# Altium PCB AT606IO_VB1.PcbDoc (part 1 of 2)
Units mm, origin at the board's own origin, x right, y up, seen from the top; angles counter-clockwise.
Board outline 66.03 x 73.03 mm, 2 copper layers (TOP, BOTTOM), stack 0.264 mm thick; 2 components, 10 nets, 12 pads, 245 vias.
Unrouted connection lines stored in the file: 2.
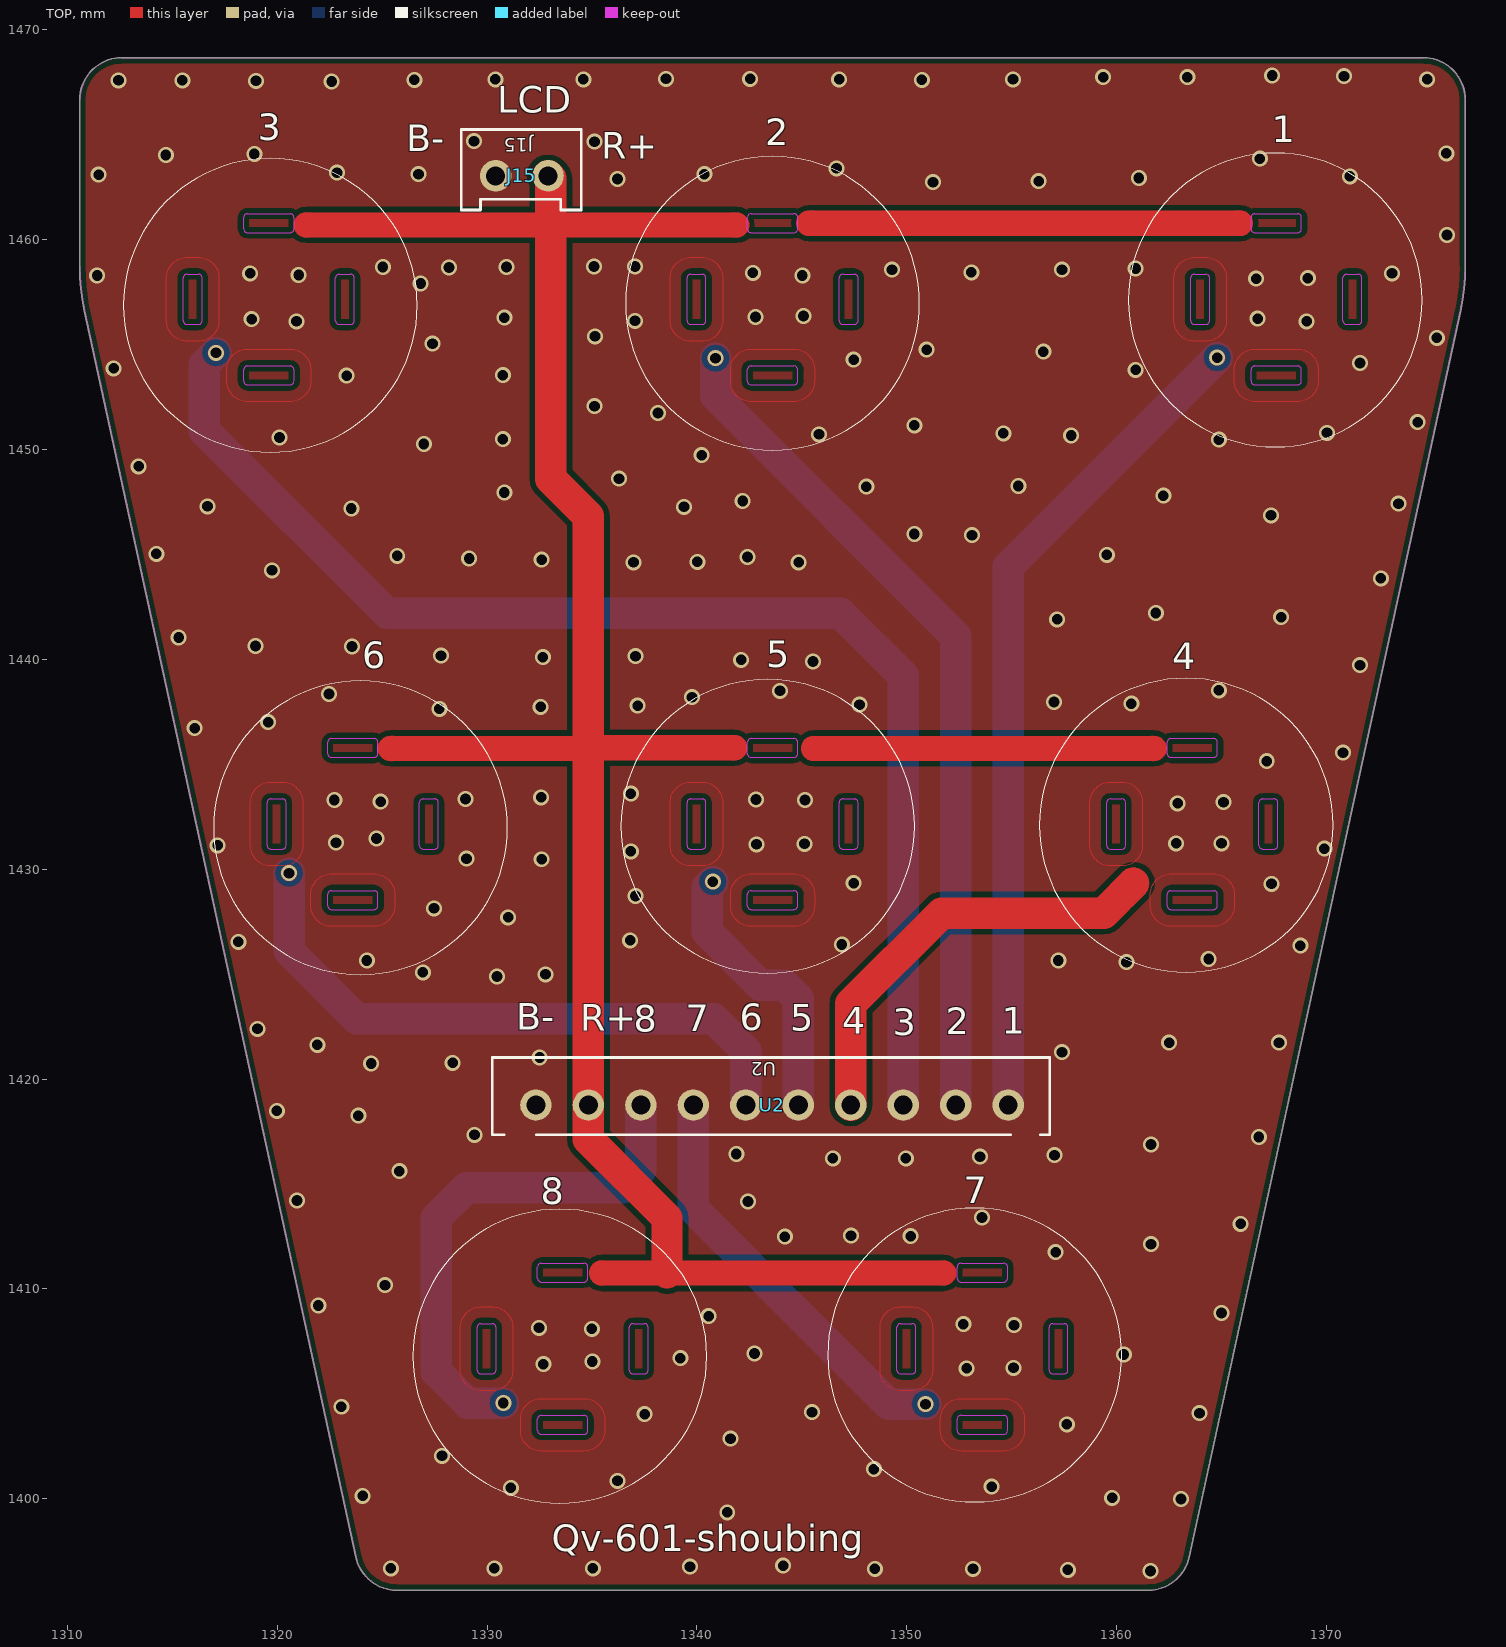
[diagram p0: TOP view]
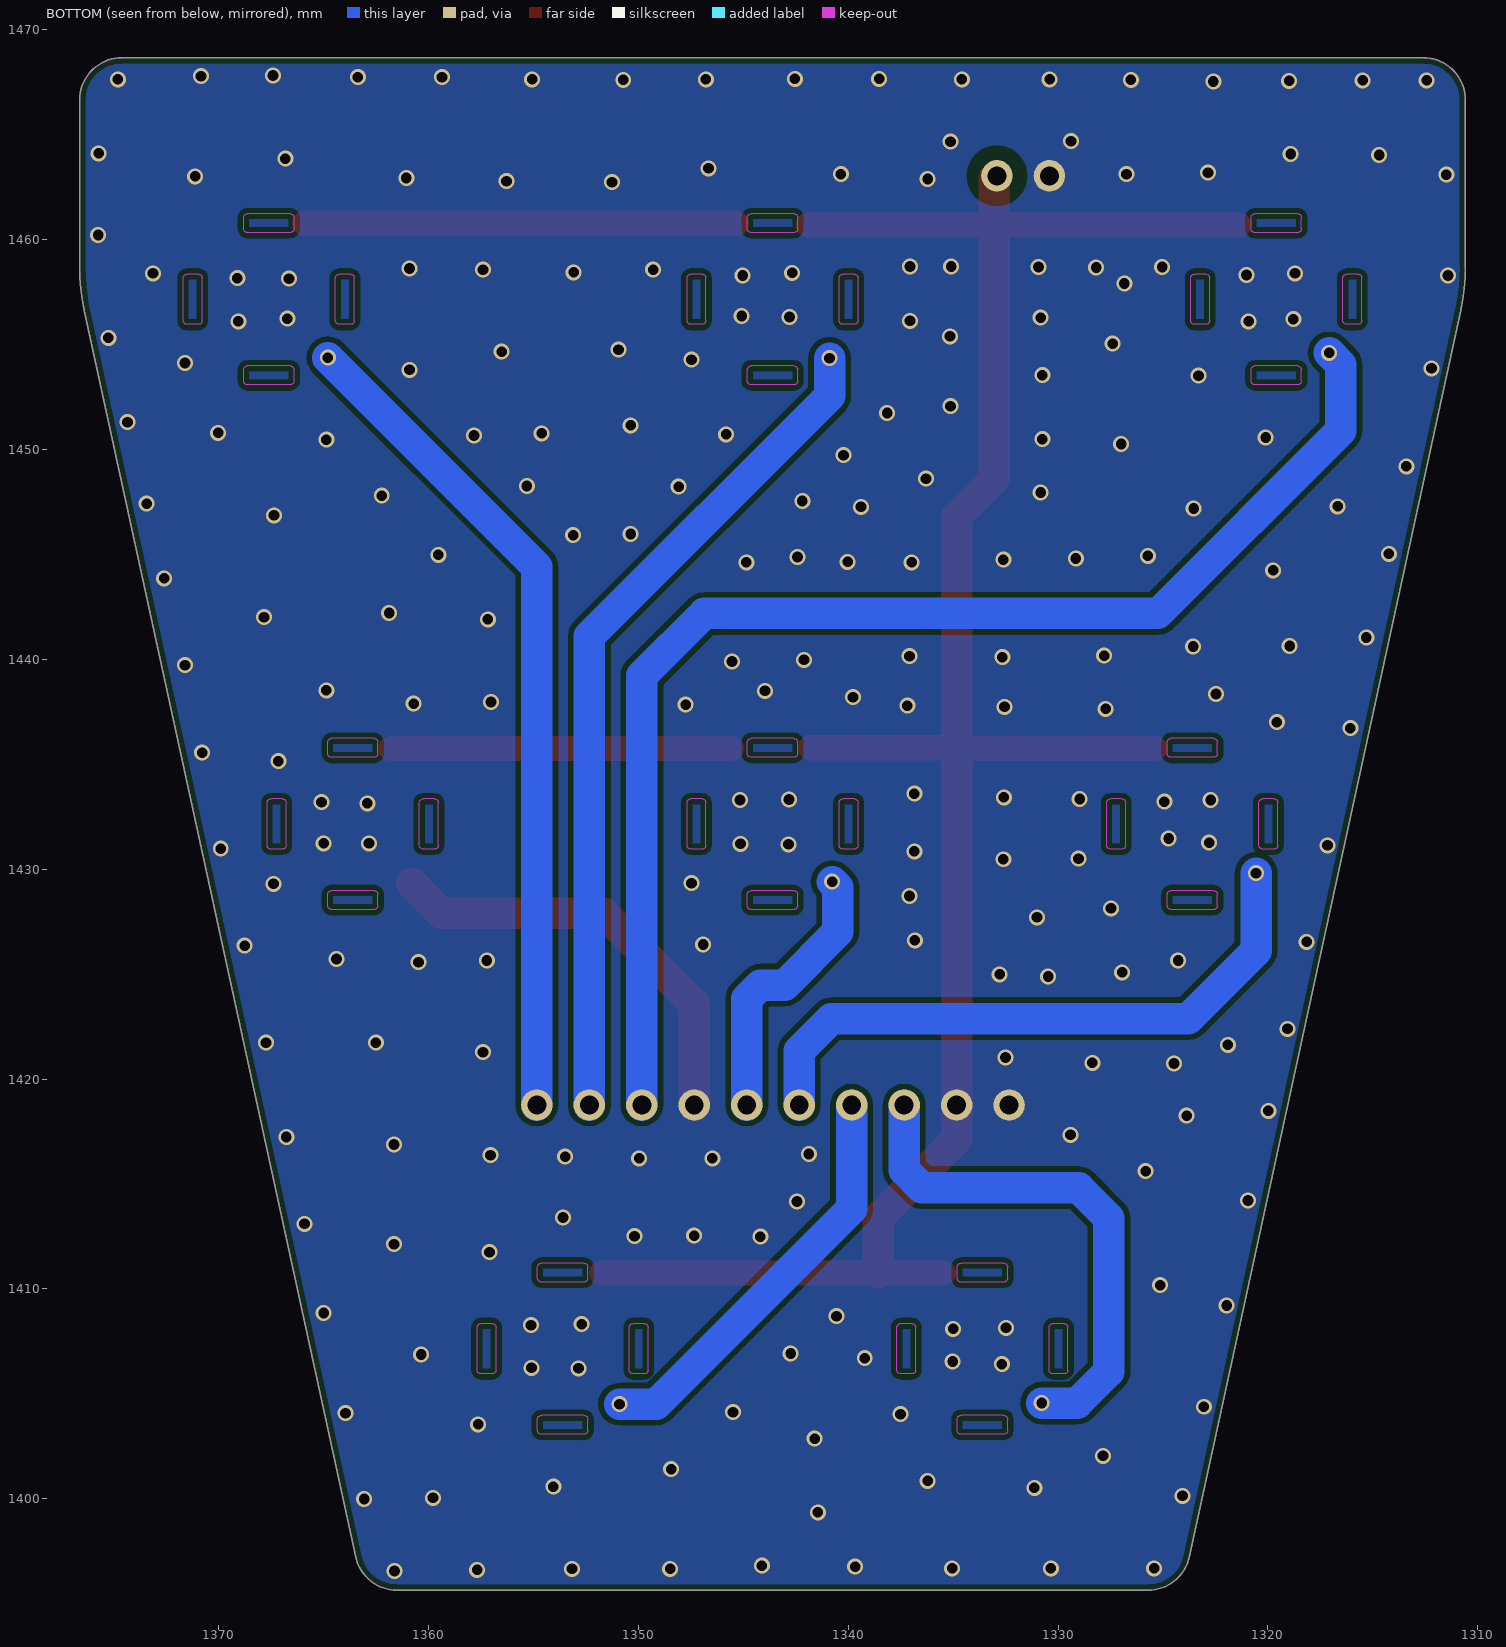
[diagram p1: BOTTOM view, seen from below]

## Layer stack, top to bottom
Top Solder: solder mask 0.0102, Solder Resist, Dk 3.5
TOP: signal copper 0.0305
Dielectric 1: core 0.2032, FR-4, Dk 4.5
BOTTOM: signal copper 0.0305
Bottom Solder: solder mask 0.0102, Solder Resist, Dk 3.5

## Board outline
1310.59,1458.731 ccw(c1320.603,1458.731) 1310.819,1456.6 1323.747,1397.227 1323.747,1397.226 ccw(c1325.714,1397.654) 1325.714,1395.642 1361.491,1395.642 ccw(c1361.491,1397.654) 1363.458,1397.226 1363.458,1397.227 1376.386,1456.6 ccw(c1366.603,1458.73) 1376.615,1458.73 1376.615,1466.655 ccw(c1374.603,1466.655) 1374.603,1468.667 1312.603,1468.667 ccw(c1312.603,1466.655) 1310.59,1466.655

## Design rules (kind name [scope] priority, off if disabled: settings)
Clearance [All] p1: gap=0.254 ignorepadtopadclearanceinfootprint=FALSE except(0: Arc-Hole Track-Hole SMDPad-Hole THPad-Hole Via-Hole Fill-Hole Poly-Hole Region-Hole Text-Hole)
PlaneConnect [All] p1: planeconnectstyle=Direct reliefexpansion=0.508 reliefentries=4 reliefconductorwidth=0.254 reliefairgap=0.254
PolygonConnect [All] p1: connectstyle=Direct reliefconductorwidth=0.254 reliefentries=4 polygonreliefangle="90 Angle" airgapwidth=0.254
RoutingVias [All] p1: holewidth=0.711 width=1.27 viastyle="Through Hole" minholewidth=0.711 minwidth=1.27 maxholewidth=0.711 maxwidth=1.27
SolderMaskExpansion [All] p1: expansion=0.102
Width [All] p1: maxlimit=0.254 minlimit=0.254 preferedwidth=0.254 impedancedriven=TRUE minimp=40.960000 maximp=62.730000 favimp=16.190000
29 further rules are at their usual default settings.

## Components (designator, comment, footprint, x,y, rotation, side; value= is the part's Value field where it differs from the comment)
J15 "CON2_XH2R54-21_ZX-XH2.54-2PZZ" XH2R54-21 1332.91,1463.038 r180 top
U2 "CON10_XH2R54-10P1_ZX-XH2.54-10P" XH2R54-10P1 1354.83,1418.766 r180 top

## Footprints (in the part's own frame and the unit in brackets; to place one, negate y for a bottom-side part, rotate by r counter-clockwise, add the part's x,y. Pads: shape width x height; smd on the part's side, far side on the other; paste and mask are expansions set on the pad)
XH2R54-10P1 [mm] "XH2R54-10P1"
  round 1.5 / inner round 1.524 / far side round 1.5 hole 0.9: 1(0,0) 2(2.5,0) 3(5,0) 4(7.5,0) 5(10,0) 6(12.5,0) 7(15,0) 8(17.5,0) 9(20,0) 10(22.5,0)
  silkscreen extent -1.98,-2.26 24.59,1.42, body extent -2.04,-2.32 24.65,1.49, height 3.81
XH2R54-21 [mm] "XH2R54-21"
  round 1.5 / inner round 1.524 / far side round 1.5 hole 0.9: 1(0,0) 2(2.5,0)
  silkscreen extent -1.57,-2.21 4.14,1.63, body extent -1.64,-2.27 4.2,1.69, height 3.81

## Via types
v1: diameter 0.762, hole 0.508, TOP to BOTTOM, 245 vias

## Nets (pads, with @x,y where several pads share a name; then routed paths per layer and width w, separated by ;. In a path a pad name is that pad's centre, name@x,y a point inside that pad or via, vN(x,y) a via of type N, cw(c..) or ccw(c..) an arc to the next point about the centre after c; other vN are vias at no path point)
1: U2.1 | length 39.7
  BOTTOM w1.5: U2.1@1354.83,1418.766 1354.83,1444.42 v1(1364.787,1454.376)
2: U2.2 | length 40.3
  BOTTOM w1.5: v1(1340.886,1454.351) 1340.886,1452.548 1352.33,1441.103 U2.2@1352.33,1418.766
3: U2.3 | length 62.5
  BOTTOM w1.5: v1(1317.086,1454.605) 1316.527,1454.046 1316.527,1450.897 1325.239,1442.184 1346.855,1442.184 1349.83,1439.209 U2.3@1349.83,1418.766
4: U2.4 | length 20.7
  TOP w1.5: U2.4@1347.33,1418.766 1347.33,1423.585 1351.655,1427.91 1359.377,1427.91 1360.799,1429.332
5: U2.5 | length 13.2
  BOTTOM w1.5: v1(1340.759,1429.408) 1340.486,1429.135 1340.486,1427.014 1343.019,1424.481 1344.188,1424.481 1344.83,1423.838 U2.5@1344.83,1418.766
6: U2.6 | length 30
  BOTTOM w1.5: v1(1320.566,1429.815) 1320.566,1426.106 1323.792,1422.88 1340.81,1422.88 1342.33,1421.36 U2.6@1342.33,1418.766
7: U2.7 | length 19.9
  BOTTOM w1.5: U2.7@1339.83,1418.766 1339.83,1413.827 1349.141,1404.516 v1(1350.893,1404.516)
8: U2.8 | length 24.9
  BOTTOM w1.5: v1(1330.777,1404.567) 1329.076,1404.567 1327.576,1406.067 1327.576,1413.381 1329.024,1414.829 1336.492,1414.829 1337.33,1415.667 U2.8@1337.33,1418.766
GND: J15.2 U2.10
  other v1: 1361.612,1396.566 1357.675,1396.617 1348.48,1396.668 1353.154,1396.668 1325.417,1396.693 1330.345,1396.693 1335.044,1396.693 1339.667,1396.769 1344.112,1396.82 1341.445,1399.36 1363.06,1399.995 1359.783,1400.046 1324.071,1400.147 1331.132,1400.528 1354.043,1400.579 1336.212,1400.859 1348.43,1401.417 1327.856,1402.052 1341.597,1402.865 1357.624,1403.551 1337.508,1404.034 1363.949,1404.084 1345.483,1404.135 1323.055,1404.389 1352.849,1406.218 1355.084,1406.243 1332.682,1406.421 1335.018,1406.548 1339.209,1406.701 1360.342,1406.878 1342.74,1406.929 1334.993,1408.098 1332.478,1408.148 1355.11,1408.275 1352.697,1408.326 1340.556,1408.707 1364.99,1408.86 1321.963,1409.215 1325.138,1410.18 1357.091,1411.755 1361.638,1412.136 1344.188,1412.492 1350.182,1412.517 1347.337,1412.543 1365.905,1413.101 1353.586,1413.406 1342.435,1414.168 1320.947,1414.219 1325.824,1415.616 1346.474,1416.226 1349.954,1416.226 1353.484,1416.302 1357.04,1416.378 1341.876,1416.429 1361.638,1416.886 1366.768,1417.242 1329.405,1417.343 1323.868,1418.258 1319.982,1418.486 1324.477,1420.747 1328.364,1420.772 1332.504,1421.026 1357.396,1421.28 1321.912,1421.636 1362.501,1421.737 1367.734,1421.737 1319.067,1422.398 1330.472,1424.887 1332.783,1424.989 1326.941,1425.09 1360.469,1425.573 1324.274,1425.649 1357.218,1425.649 1364.381,1425.725 1368.75,1426.36 1346.906,1426.411 1318.153,1426.538 1336.822,1426.614 1331.005,1427.706 1327.475,1428.138 1337.076,1428.722 1367.378,1429.307 1347.464,1429.332 1332.605,1430.475 1329.024,1430.5 1336.847,1430.856 1369.893,1430.983 1317.162,1431.135 1342.842,1431.186 1345.128,1431.212 1362.831,1431.237 1364.99,1431.237 1322.801,1431.262 1324.731,1431.466 1362.908,1433.142 1365.092,1433.193 1324.935,1433.218 1322.725,1433.294 1345.153,1433.294 1342.816,1433.32 1328.973,1433.345 1332.58,1433.421 1336.847,1433.599 1367.149,1435.149 1370.782,1435.555 1316.07,1436.723 1319.575,1437.003 1327.729,1437.638 1332.555,1437.739 1337.177,1437.79 1347.744,1437.841 1360.698,1437.892 1357.015,1437.968 1339.768,1438.197 1322.471,1438.349 1343.959,1438.501 1364.863,1438.527 1371.594,1439.721 1345.534,1439.898 1342.105,1439.975 1332.656,1440.102 1337.076,1440.152 1327.805,1440.178 1323.563,1440.61 1318.966,1440.635 1315.308,1441.041 1357.167,1441.905 1367.835,1442.007 1361.866,1442.21 1372.585,1443.861 1319.753,1444.242 1336.974,1444.623 1344.848,1444.623 1340.022,1444.648 1332.605,1444.75 1329.151,1444.801 1342.41,1444.877 1325.722,1444.928 1359.529,1444.978 1314.241,1445.029 1353.103,1445.918 1350.36,1445.969 1367.353,1446.858 1323.538,1447.188 1339.387,1447.264 1316.68,1447.29 1373.423,1447.417 1342.181,1447.544 1362.222,1447.798 1330.827,1447.95 1348.074,1448.23 1355.313,1448.255 1336.288,1448.611 1313.403,1449.195 1340.225,1449.728 1326.992,1450.262 1364.863,1450.465 1330.751,1450.49 1320.109,1450.566 1357.828,1450.668 1345.813,1450.719 1354.602,1450.77 1370.02,1450.795 1350.36,1451.151 1374.338,1451.303 1338.143,1451.735 1335.12,1452.065 1323.309,1453.513 1330.751,1453.538 1360.901,1453.792 1312.209,1453.868 1371.594,1454.122 1347.464,1454.275 1356.507,1454.656 1350.944,1454.757 1327.398,1455.037 1375.252,1455.316 1335.145,1455.392 1320.921,1456.104 1369.054,1456.104 1337.05,1456.129 1318.788,1456.205 1366.718,1456.231 1330.827,1456.281 1342.791,1456.307 1345.077,1456.358 1326.84,1457.907 1366.641,1458.136 1369.105,1458.161 1311.422,1458.288 1345.026,1458.288 1321.023,1458.313 1318.712,1458.39 1373.118,1458.39 1342.664,1458.415 1353.078,1458.44 1349.293,1458.567 1357.396,1458.567 1360.901,1458.618 1328.186,1458.669 1325.036,1458.694 1330.929,1458.694 1335.095,1458.72 1337.05,1458.72 1375.735,1460.218 1351.249,1462.733 1356.278,1462.784 1336.212,1462.885 1361.053,1462.936 1371.112,1463.012 1311.498,1463.089 1326.738,1463.114 1340.352,1463.114 1322.852,1463.19 1346.652,1463.393 1366.819,1463.851 1314.698,1464.028 1318.915,1464.079 1375.709,1464.105 1335.12,1464.663 1329.38,1464.689 1322.598,1467.534 1318.991,1467.559 1312.438,1467.584 1315.486,1467.584 1326.535,1467.61 1350.716,1467.61 1330.396,1467.635 1334.587,1467.635 1346.779,1467.635 1355.059,1467.635 1374.795,1467.635 1338.524,1467.661 1342.537,1467.661 1359.352,1467.737 1363.365,1467.737 1370.832,1467.788 1367.403,1467.813
V+: J15.1 U2.9 | length 144.7
  TOP w1.2: 1321.379,1460.701 1333.012,1460.701 1333.037,1460.726 1333.063,1460.701 1341.902,1460.701 ; 1325.392,1435.758 1334.805,1435.758 1334.83,1435.733 1334.881,1435.784 1341.8,1435.784 ; 1335.45,1410.765 1338.574,1410.765 1351.757,1410.765 ; 1345.331,1460.777 1365.905,1460.777 ; 1345.559,1435.758 1361.79,1435.758
  TOP w1.5: J15.1@1332.91,1463.038 1333.037,1462.911 1333.037,1460.726 1333.037,1448.611 1334.83,1446.817 1334.83,1435.733 U2.9@1334.83,1418.766 1334.83,1417.125 1338.574,1413.381 1338.574,1410.765

## Polygon pours and split planes (outlines as drawn)
no net on Top Solder (solid): 82 vertices, not listed, extent 1314.728,1455.155 1317.228,1459.155
no net on Top Solder (solid): 82 vertices, not listed, extent 1317.603,1452.28 1321.603,1454.78
no net on Top Solder (solid): 82 vertices, not listed, extent 1317.603,1459.53 1321.603,1462.029
no net on Top Solder (solid): 82 vertices, not listed, extent 1321.978,1455.155 1324.478,1459.155
no net on Top Solder (solid): 82 vertices, not listed, extent 1338.728,1455.155 1341.228,1459.155
no net on Top Solder (solid): 82 vertices, not listed, extent 1341.603,1452.28 1345.603,1454.78
no net on Top Solder (solid): 82 vertices, not listed, extent 1341.603,1459.53 1345.603,1462.029
no net on Top Solder (solid): 82 vertices, not listed, extent 1345.978,1455.155 1348.478,1459.155
no net on Top Solder (solid): 82 vertices, not listed, extent 1365.603,1452.28 1369.603,1454.78
no net on Top Solder (solid): 82 vertices, not listed, extent 1365.603,1459.53 1369.603,1462.029
no net on Top Solder (solid): 82 vertices, not listed, extent 1362.728,1455.155 1365.228,1459.155
no net on Top Solder (solid): 82 vertices, not listed, extent 1369.978,1455.155 1372.478,1459.155
no net on Top Solder (solid): 82 vertices, not listed, extent 1321.603,1427.28 1325.603,1429.78
no net on Top Solder (solid): 82 vertices, not listed, extent 1318.728,1430.155 1321.228,1434.155
no net on Top Solder (solid): 82 vertices, not listed, extent 1321.603,1434.53 1325.603,1437.03
no net on Top Solder (solid): 82 vertices, not listed, extent 1325.978,1430.155 1328.478,1434.155
no net on Top Solder (solid): 82 vertices, not listed, extent 1338.728,1430.155 1341.228,1434.155
no net on Top Solder (solid): 82 vertices, not listed, extent 1341.603,1427.28 1345.603,1429.78
no net on Top Solder (solid): 82 vertices, not listed, extent 1341.603,1434.53 1345.603,1437.03
no net on Top Solder (solid): 82 vertices, not listed, extent 1345.978,1430.155 1348.478,1434.155
no net on Top Solder (solid): 82 vertices, not listed, extent 1358.728,1430.155 1361.228,1434.155
no net on Top Solder (solid): 82 vertices, not listed, extent 1361.603,1427.28 1365.603,1429.78
no net on Top Solder (solid): 82 vertices, not listed, extent 1361.603,1434.53 1365.603,1437.03
no net on Top Solder (solid): 82 vertices, not listed, extent 1365.978,1430.155 1368.478,1434.155
no net on Top Solder (solid): 82 vertices, not listed, extent 1331.603,1402.279 1335.603,1404.779
no net on Top Solder (solid): 82 vertices, not listed, extent 1328.728,1405.154 1331.228,1409.154
no net on Top Solder (solid): 82 vertices, not listed, extent 1331.603,1409.529 1335.603,1412.03
no net on Top Solder (solid): 82 vertices, not listed, extent 1335.978,1405.154 1338.478,1409.154
no net on Top Solder (solid): 82 vertices, not listed, extent 1348.728,1405.154 1351.228,1409.154
no net on Top Solder (solid): 82 vertices, not listed, extent 1351.603,1402.279 1355.603,1404.779
no net on Top Solder (solid): 82 vertices, not listed, extent 1355.978,1405.154 1358.478,1409.154
no net on Top Solder (solid): 82 vertices, not listed, extent 1351.603,1409.529 1355.603,1412.03
GND on TOP (solid, pour order 84): 27 vertices, not listed, extent 1336.187,1420.01 1357.777,1434.209
GND on TOP (solid, pour order 82): 82 vertices, not listed, extent 1345.978,1430.155 1348.478,1434.155
GND on TOP (solid, pour order 80): 88 vertices, not listed, extent 1310.803,1395.855 1376.402,1468.454
GND on TOP (solid, pour order 78): 82 vertices, not listed, extent 1369.978,1455.155 1372.478,1459.155
GND on TOP (solid, pour order 74): 82 vertices, not listed, extent 1345.978,1455.155 1348.478,1459.155
GND on TOP (solid, pour order 72): 82 vertices, not listed, extent 1321.978,1455.155 1324.478,1459.155
GND on TOP (solid, pour order 70): 82 vertices, not listed, extent 1365.978,1430.155 1368.478,1434.155
GND on TOP (solid, pour order 68): 82 vertices, not listed, extent 1325.978,1430.155 1328.478,1434.155
GND on TOP (solid, pour order 66): 82 vertices, not listed, extent 1355.978,1405.154 1358.478,1409.154
GND on TOP (solid, pour order 64): 82 vertices, not listed, extent 1335.978,1405.154 1338.478,1409.154
V+ on TOP (solid, pour order 62): 82 vertices, not listed, extent 1361.603,1434.53 1365.603,1437.03
V+ on TOP (solid, pour order 60): 82 vertices, not listed, extent 1321.603,1434.53 1325.603,1437.03
V+ on TOP (solid, pour order 58): 82 vertices, not listed, extent 1365.603,1459.53 1369.603,1462.029
V+ on TOP (solid, pour order 56): 82 vertices, not listed, extent 1317.603,1459.53 1321.603,1462.029
V+ on TOP (solid, pour order 54): 82 vertices, not listed, extent 1341.603,1459.53 1345.603,1462.029
V+ on TOP (solid, pour order 52): 82 vertices, not listed, extent 1341.603,1434.53 1345.603,1437.03
V+ on TOP (solid, pour order 50): 82 vertices, not listed, extent 1351.603,1409.529 1355.603,1412.03
V+ on TOP (solid, pour order 48): 82 vertices, not listed, extent 1331.603,1409.529 1335.603,1412.03
2 on TOP (solid, pour order 46): 1338.524,1455.469 1338.524,1459.253 1341.064,1459.253 1341.47,1458.847 1341.47,1455.367 1341.953,1454.884 1345.204,1454.884 1345.89,1454.199 1345.89,1452.878 1345.102,1452.09 1341.902,1452.09 1338.524,1455.469
2 on TOP (solid, pour order 44): 82 vertices, not listed, extent 1338.728,1455.155 1341.228,1459.155
2 on TOP (solid, pour order 42): 82 vertices, not listed, extent 1341.603,1452.28 1345.603,1454.78
3 on TOP (solid, pour order 40): 1314.546,1455.443 1314.546,1459.228 1317.086,1459.228 1317.492,1458.821 1317.492,1455.342 1317.975,1454.859 1321.226,1454.859 1321.912,1454.173 1321.912,1452.852 1321.125,1452.065 1317.924,1452.065 1314.546,1455.443
3 on TOP (solid, pour order 38): 82 vertices, not listed, extent 1314.728,1455.155 1317.228,1459.155
3 on TOP (solid, pour order 36): 82 vertices, not listed, extent 1317.603,1452.28 1321.603,1454.78
4 on TOP (solid, pour order 34): 1358.488,1430.45 1358.488,1434.234 1361.028,1434.234 1361.434,1433.828 1361.434,1430.348 1361.917,1429.865 1365.168,1429.865 1365.854,1429.18 1365.854,1427.859 1365.067,1427.071 1361.866,1427.071 1358.488,1430.45
4 on TOP (solid, pour order 32): 82 vertices, not listed, extent 1358.728,1430.155 1361.228,1434.155
4 on TOP (solid, pour order 30): 82 vertices, not listed, extent 1361.603,1427.28 1365.603,1429.78
5 on TOP (solid, pour order 28): 1338.498,1430.45 1338.498,1434.234 1341.038,1434.234 1341.445,1433.828 1341.445,1430.348 1341.927,1429.865 1345.178,1429.865 1345.864,1429.18 1345.864,1427.859 1345.077,1427.071 1341.876,1427.071 1338.498,1430.45
5 on TOP (solid, pour order 26): 82 vertices, not listed, extent 1341.603,1427.28 1345.603,1429.78
5 on TOP (solid, pour order 24): 82 vertices, not listed, extent 1338.728,1430.155 1341.228,1434.155
6 on TOP (solid, pour order 22): 1318.508,1430.5 1318.508,1434.285 1321.048,1434.285 1321.455,1433.879 1321.455,1430.399 1321.937,1429.916 1325.189,1429.916 1325.874,1429.23 1325.874,1427.91 1325.087,1427.122 1321.887,1427.122 1318.508,1430.5
6 on TOP (solid, pour order 20): 82 vertices, not listed, extent 1321.603,1427.28 1325.603,1429.78
6 on TOP (solid, pour order 18): 82 vertices, not listed, extent 1318.728,1430.155 1321.228,1434.155
7 on TOP (solid, pour order 16): 1348.48,1405.481 1348.48,1409.266 1351.02,1409.266 1351.427,1408.86 1351.427,1405.38 1351.909,1404.897 1355.161,1404.897 1355.846,1404.211 1355.846,1402.891 1355.059,1402.103 1351.859,1402.103 1348.48,1405.481
7 on TOP (solid, pour order 14): 82 vertices, not listed, extent 1348.728,1405.154 1351.228,1409.154
7 on TOP (solid, pour order 12): 82 vertices, not listed, extent 1351.603,1402.279 1355.603,1404.779
8 on TOP (solid, pour order 10): 1328.44,1405.507 1328.44,1409.291 1330.98,1409.291 1331.386,1408.885 1331.386,1405.405 1331.869,1404.923 1335.12,1404.923 1335.806,1404.237 1335.806,1402.916 1335.018,1402.129 1331.818,1402.129 1328.44,1405.507
8 on TOP (solid, pour order 8): 82 vertices, not listed, extent 1328.728,1405.154 1331.228,1409.154
8 on TOP (solid, pour order 6): 82 vertices, not listed, extent 1331.603,1402.279 1335.603,1404.779
1 on TOP (solid, pour order 4): 1362.476,1455.443 1362.476,1459.228 1365.016,1459.228 1365.422,1458.821 1365.422,1455.342 1365.905,1454.859 1369.156,1454.859 1369.842,1454.173 1369.842,1452.852 1369.054,1452.065 1365.854,1452.065 1362.476,1455.443
1 on TOP (solid, pour order 2): 82 vertices, not listed, extent 1362.728,1455.155 1365.228,1459.155
1 on TOP (solid, pour order 0): 82 vertices, not listed, extent 1365.603,1452.28 1369.603,1454.78
GND on BOTTOM (solid, pour order 76): 88 vertices, not listed, extent 1310.803,1395.855 1376.402,1468.454

## Keep-outs
Keep-Out Layer:
  lines w0.025: 1310.603,1458.731 ccw(c1320.603,1458.731) 1310.832,1456.603 ; 1310.603,1458.731 ccw(c1320.603,1458.731) 1310.832,1456.603 ; 1310.603,1458.731 1310.603,1466.655 ; 1310.603,1458.731 1310.603,1466.655 ; 1310.603,1466.655 cw(c1312.603,1466.655) 1312.603,1468.655 ; 1310.603,1466.655 cw(c1312.603,1466.655) 1312.603,1468.655 ; 1310.832,1456.603 1323.76,1397.229 ; 1310.832,1456.603 1323.76,1397.229 ; 1312.603,1468.654 1374.603,1468.654 ; 1312.603,1468.654 1374.603,1468.654 ; 1315.528,1456.138 ccw(c1315.711,1456.138) 1315.711,1455.954 ; 1315.528,1456.138 ccw(c1315.711,1456.138) 1315.711,1455.954 ; 1315.528,1456.138 1315.528,1458.171 ; 1315.528,1456.138 1315.528,1458.171 ; 1315.528,1458.171 cw(c1315.711,1458.171) 1315.711,1458.355 ; 1315.528,1458.171 cw(c1315.711,1458.171) 1315.711,1458.355 ; 1315.711,1455.954 1316.244,1455.954 ; 1315.711,1455.954 1316.244,1455.954 ; 1315.711,1458.355 1316.244,1458.355 ; 1315.711,1458.355 1316.244,1458.355 ; 1316.244,1455.954 ccw(c1316.244,1456.138) 1316.428,1456.138 ; 1316.244,1455.954 ccw(c1316.244,1456.138) 1316.428,1456.138 ; 1316.244,1458.355 cw(c1316.244,1458.171) 1316.428,1458.171 ; 1316.244,1458.355 cw(c1316.244,1458.171) 1316.428,1458.171 ; 1316.428,1456.138 1316.428,1458.171 ; 1316.428,1456.138 1316.428,1458.171 ; 1318.403,1453.263 ccw(c1318.586,1453.263) 1318.586,1453.079 ; 1318.403,1453.263 ccw(c1318.586,1453.263) 1318.586,1453.079 ; 1318.403,1453.263 1318.403,1453.796 ; 1318.403,1453.263 1318.403,1453.796 ; 1318.403,1453.796 cw(c1318.586,1453.796) 1318.586,1453.979 ; 1318.403,1453.796 cw(c1318.586,1453.796) 1318.586,1453.979 ; 1318.403,1460.513 ccw(c1318.586,1460.513) 1318.586,1460.329 ; 1318.403,1460.513 ccw(c1318.586,1460.513) 1318.586,1460.329 ; 1318.403,1460.513 1318.403,1461.046 ; 1318.403,1460.513 1318.403,1461.046 ; 1318.403,1461.046 cw(c1318.586,1461.046) 1318.586,1461.23 ; 1318.403,1461.046 cw(c1318.586,1461.046) 1318.586,1461.23 ; 1318.586,1453.079 1320.619,1453.079 ; 1318.586,1453.079 1320.619,1453.079 ; 1318.586,1453.979 1320.619,1453.979 ; 1318.586,1453.979 1320.619,1453.979 ; 1318.586,1460.329 1320.619,1460.329 ; 1318.586,1460.329 1320.619,1460.329 ; 1318.586,1461.23 1320.619,1461.23 ; 1318.586,1461.23 1320.619,1461.23 ; 1319.528,1431.138 ccw(c1319.711,1431.138) 1319.711,1430.954 ; 1319.528,1431.138 ccw(c1319.711,1431.138) 1319.711,1430.954 ; 1319.528,1431.138 1319.528,1433.171 ; 1319.528,1431.138 1319.528,1433.171 ; 1319.528,1433.171 cw(c1319.711,1433.171) 1319.711,1433.355 ; 1319.528,1433.171 cw(c1319.711,1433.171) 1319.711,1433.355 ; 1319.711,1430.955 1320.244,1430.955 ; 1319.711,1430.955 1320.244,1430.955 ; 1319.711,1433.354 1320.244,1433.354 ; 1319.711,1433.354 1320.244,1433.354 ; 1320.244,1430.954 ccw(c1320.244,1431.138) 1320.428,1431.138 ; 1320.244,1430.954 ccw(c1320.244,1431.138) 1320.428,1431.138 ; 1320.244,1433.355 cw(c1320.244,1433.171) 1320.428,1433.171 ; 1320.244,1433.355 cw(c1320.244,1433.171) 1320.428,1433.171 ; 1320.428,1431.138 1320.428,1433.171 ; 1320.428,1431.138 1320.428,1433.171 ; 1320.619,1453.079 ccw(c1320.619,1453.263) 1320.803,1453.263 ; 1320.619,1453.079 ccw(c1320.619,1453.263) 1320.803,1453.263 ; 1320.619,1453.979 cw(c1320.619,1453.796) 1320.803,1453.796 ; 1320.619,1453.979 cw(c1320.619,1453.796) 1320.803,1453.796 ; 1320.619,1460.329 ccw(c1320.619,1460.513) 1320.803,1460.513 ; 1320.619,1460.329 ccw(c1320.619,1460.513) 1320.803,1460.513 ; 1320.619,1461.23 cw(c1320.619,1461.046) 1320.803,1461.046 ; 1320.619,1461.23 cw(c1320.619,1461.046) 1320.803,1461.046 ; 1320.803,1453.263 1320.803,1453.796 ; 1320.803,1453.263 1320.803,1453.796 ; 1320.803,1460.513 1320.803,1461.046 ; 1320.803,1460.513 1320.803,1461.046 ; 1322.403,1428.263 ccw(c1322.586,1428.263) 1322.586,1428.079 ; 1322.403,1428.263 ccw(c1322.586,1428.263) 1322.586,1428.079 ; 1322.403,1428.263 1322.403,1428.796 ; 1322.403,1428.263 1322.403,1428.796 ; 1322.403,1428.796 cw(c1322.586,1428.796) 1322.586,1428.98 ; 1322.403,1428.796 cw(c1322.586,1428.796) 1322.586,1428.98 ; 1322.403,1435.513 ccw(c1322.586,1435.513) 1322.586,1435.329 ; 1322.403,1435.513 ccw(c1322.586,1435.513) 1322.586,1435.329 ; 1322.403,1435.513 1322.403,1436.046 ; 1322.403,1435.513 1322.403,1436.046 ; 1322.403,1436.046 cw(c1322.586,1436.046) 1322.586,1436.229 ; 1322.403,1436.046 cw(c1322.586,1436.046) 1322.586,1436.229 ; 1322.586,1428.08 1324.619,1428.08 ; 1322.586,1428.08 1324.619,1428.08 ; 1322.586,1428.979 1324.619,1428.979 ; 1322.586,1428.979 1324.619,1428.979 ; 1322.586,1435.329 1324.619,1435.329 ; 1322.586,1435.329 1324.619,1435.329 ; 1322.586,1436.229 1324.619,1436.229 ; 1322.586,1436.229 1324.619,1436.229 ; 1322.778,1456.138 ccw(c1322.961,1456.138) 1322.961,1455.954 ; 1322.778,1456.138 ccw(c1322.961,1456.138) 1322.961,1455.954 ; 1322.778,1456.138 1322.778,1458.171 ; 1322.778,1456.138 1322.778,1458.171 ; 1322.778,1458.171 cw(c1322.961,1458.171) 1322.961,1458.355 ; 1322.778,1458.171 cw(c1322.961,1458.171) 1322.961,1458.355 ; 1322.961,1455.954 1323.494,1455.954 ; 1322.961,1455.954 1323.494,1455.954 ; 1322.961,1458.355 1323.494,1458.355 ; 1322.961,1458.355 1323.494,1458.355 ; 1323.494,1455.954 ccw(c1323.494,1456.138) 1323.678,1456.138 ; 1323.494,1455.954 ccw(c1323.494,1456.138) 1323.678,1456.138 ; 1323.494,1458.355 cw(c1323.494,1458.171) 1323.678,1458.171 ; 1323.494,1458.355 cw(c1323.494,1458.171) 1323.678,1458.171 ; 1323.678,1456.138 1323.678,1458.171 ; 1323.678,1456.138 1323.678,1458.171 ; 1323.76,1397.229 ccw(c1325.714,1397.654) 1325.714,1395.654 ; 1323.76,1397.229 ccw(c1325.714,1397.654) 1325.714,1395.654 ; 1324.619,1428.079 ccw(c1324.619,1428.263) 1324.803,1428.263 ; 1324.619,1428.079 ccw(c1324.619,1428.263) 1324.803,1428.263 ; 1324.619,1428.98 cw(c1324.619,1428.796) 1324.803,1428.796 ; 1324.619,1428.98 cw(c1324.619,1428.796) 1324.803,1428.796 ; 1324.619,1435.329 ccw(c1324.619,1435.513) 1324.803,1435.513 ; 1324.619,1435.329 ccw(c1324.619,1435.513) 1324.803,1435.513 ; 1324.619,1436.229 cw(c1324.619,1436.046) 1324.803,1436.046 ; 1324.619,1436.229 cw(c1324.619,1436.046) 1324.803,1436.046 ; 1324.803,1428.263 1324.803,1428.796 ; 1324.803,1428.263 1324.803,1428.796 ; 1324.803,1435.513 1324.803,1436.046 ; 1324.803,1435.513 1324.803,1436.046 ; 1325.714,1395.655 1361.491,1395.655 ; 1325.714,1395.655 1361.491,1395.655 ; 1326.778,1431.138 ccw(c1326.961,1431.138) 1326.961,1430.954 ; 1326.778,1431.138 ccw(c1326.961,1431.138) 1326.961,1430.954 ; 1326.778,1431.138 1326.778,1433.171 ; 1326.778,1431.138 1326.778,1433.171 ; 1326.778,1433.171 cw(c1326.961,1433.171) 1326.961,1433.355 ; 1326.778,1433.171 cw(c1326.961,1433.171) 1326.961,1433.355 ; 1326.961,1430.955 1327.494,1430.955 ; 1326.961,1430.955 1327.494,1430.955 ; 1326.961,1433.354 1327.494,1433.354 ; 1326.961,1433.354 1327.494,1433.354 ; 1327.494,1430.954 ccw(c1327.494,1431.138) 1327.678,1431.138 ; 1327.494,1430.954 ccw(c1327.494,1431.138) 1327.678,1431.138 ; 1327.494,1433.355 cw(c1327.494,1433.171) 1327.678,1433.171 ; 1327.494,1433.355 cw(c1327.494,1433.171) 1327.678,1433.171 ; 1327.678,1431.138 1327.678,1433.171 ; 1327.678,1431.138 1327.678,1433.171 ; 1329.528,1406.138 ccw(c1329.711,1406.138) 1329.711,1405.955 ; 1329.528,1406.138 ccw(c1329.711,1406.138) 1329.711,1405.955 ; 1329.528,1406.138 1329.528,1408.171 ; 1329.528,1406.138 1329.528,1408.171 ; 1329.528,1408.171 cw(c1329.711,1408.171) 1329.711,1408.355 ; 1329.528,1408.171 cw(c1329.711,1408.171) 1329.711,1408.355 ; 1329.711,1405.955 1330.244,1405.955 ; 1329.711,1405.955 1330.244,1405.955 ; 1329.711,1408.355 1330.244,1408.355 ; 1329.711,1408.355 1330.244,1408.355 ; 1330.244,1405.955 ccw(c1330.244,1406.138) 1330.428,1406.138 ; 1330.244,1405.955 ccw(c1330.244,1406.138) 1330.428,1406.138 ; 1330.244,1408.355 cw(c1330.244,1408.171) 1330.428,1408.171 ; 1330.244,1408.355 cw(c1330.244,1408.171) 1330.428,1408.171 ; 1330.428,1406.138 1330.428,1408.171 ; 1330.428,1406.138 1330.428,1408.171 ; 1332.403,1403.263 ccw(c1332.586,1403.263) 1332.586,1403.08 ; 1332.403,1403.263 ccw(c1332.586,1403.263) 1332.586,1403.08 ; 1332.403,1403.263 1332.403,1403.796 ; 1332.403,1403.263 1332.403,1403.796 ; 1332.403,1403.796 cw(c1332.586,1403.796) 1332.586,1403.98 ; 1332.403,1403.796 cw(c1332.586,1403.796) 1332.586,1403.98 ; 1332.403,1410.513 ccw(c1332.586,1410.513) 1332.586,1410.33 ; 1332.403,1410.513 ccw(c1332.586,1410.513) 1332.586,1410.33 ; 1332.403,1410.513 1332.403,1411.046 ; 1332.403,1410.513 1332.403,1411.046 ; 1332.403,1411.046 cw(c1332.586,1411.046) 1332.586,1411.23 ; 1332.403,1411.046 cw(c1332.586,1411.046) 1332.586,1411.23 ; 1332.586,1403.08 1334.619,1403.08 ; 1332.586,1403.08 1334.619,1403.08 ; 1332.586,1403.98 1334.619,1403.98 ; 1332.586,1403.98 1334.619,1403.98 ; 1332.586,1410.33 1334.619,1410.33 ; 1332.586,1410.33 1334.619,1410.33 ; 1332.586,1411.229 1334.619,1411.229 ; 1332.586,1411.229 1334.619,1411.229 ; 1334.619,1403.08 ccw(c1334.619,1403.263) 1334.803,1403.263 ; 1334.619,1403.08 ccw(c1334.619,1403.263) 1334.803,1403.263 ; 1334.619,1403.98 cw(c1334.619,1403.796) 1334.803,1403.796 ; 1334.619,1403.98 cw(c1334.619,1403.796) 1334.803,1403.796 ; 1334.619,1410.33 ccw(c1334.619,1410.513) 1334.803,1410.513 ; 1334.619,1410.33 ccw(c1334.619,1410.513) 1334.803,1410.513 ; 1334.619,1411.23 cw(c1334.619,1411.046) 1334.803,1411.046 ; 1334.619,1411.23 cw(c1334.619,1411.046) 1334.803,1411.046 ; 1334.803,1403.263 1334.803,1403.796 ; 1334.803,1403.263 1334.803,1403.796 ; 1334.803,1410.513 1334.803,1411.046 ; 1334.803,1410.513 1334.803,1411.046 ; 1336.778,1406.138 ccw(c1336.961,1406.138) 1336.961,1405.955 ; 1336.778,1406.138 ccw(c1336.961,1406.138) 1336.961,1405.955 ; 1336.778,1406.138 1336.778,1408.171 ; 1336.778,1406.138 1336.778,1408.171 ; 1336.778,1408.171 cw(c1336.961,1408.171) 1336.961,1408.355 ; 1336.778,1408.171 cw(c1336.961,1408.171) 1336.961,1408.355 ; 1336.961,1405.955 1337.494,1405.955 ; 1336.961,1405.955 1337.494,1405.955 ; 1336.961,1408.355 1337.494,1408.355 ; 1336.961,1408.355 1337.494,1408.355 ; 1337.494,1405.955 ccw(c1337.494,1406.138) 1337.678,1406.138 ; 1337.494,1405.955 ccw(c1337.494,1406.138) 1337.678,1406.138 ; 1337.494,1408.355 cw(c1337.494,1408.171) 1337.678,1408.171 ; 1337.494,1408.355 cw(c1337.494,1408.171) 1337.678,1408.171 ; 1337.678,1406.138 1337.678,1408.171 ; 1337.678,1406.138 1337.678,1408.171 ; 1339.528,1431.138 ccw(c1339.711,1431.138) 1339.711,1430.954 ; 1339.528,1431.138 ccw(c1339.711,1431.138) 1339.711,1430.954 ; 1339.528,1431.138 1339.528,1433.171 ; 1339.528,1431.138 1339.528,1433.171 ; 1339.528,1433.171 cw(c1339.711,1433.171) 1339.711,1433.355 ; 1339.528,1433.171 cw(c1339.711,1433.171) 1339.711,1433.355 ; 1339.528,1456.138 ccw(c1339.711,1456.138) 1339.711,1455.954 ; 1339.528,1456.138 ccw(c1339.711,1456.138) 1339.711,1455.954 ; 1339.528,1456.138 1339.528,1458.171 ; 1339.528,1456.138 1339.528,1458.171 ; 1339.528,1458.171 cw(c1339.711,1458.171) 1339.711,1458.355 ; 1339.528,1458.171 cw(c1339.711,1458.171) 1339.711,1458.355 ; 1339.711,1430.955 1340.244,1430.955 ; 1339.711,1430.955 1340.244,1430.955 ; 1339.711,1433.354 1340.244,1433.354 ; 1339.711,1433.354 1340.244,1433.354 ; 1339.711,1455.954 1340.244,1455.954 ; 1339.711,1455.954 1340.244,1455.954 ; 1339.711,1458.355 1340.244,1458.355 ; 1339.711,1458.355 1340.244,1458.355 ; 1340.244,1430.954 ccw(c1340.244,1431.138) 1340.428,1431.138 ; 1340.244,1430.954 ccw(c1340.244,1431.138) 1340.428,1431.138 ; 1340.244,1433.355 cw(c1340.244,1433.171) 1340.428,1433.171 ; 1340.244,1433.355 cw(c1340.244,1433.171) 1340.428,1433.171 ; 1340.244,1455.954 ccw(c1340.244,1456.138) 1340.428,1456.138 ; 1340.244,1455.954 ccw(c1340.244,1456.138) 1340.428,1456.138 ; 1340.244,1458.355 cw(c1340.244,1458.171) 1340.428,1458.171 ; 1340.244,1458.355 cw(c1340.244,1458.171) 1340.428,1458.171 ; 1340.428,1431.138 1340.428,1433.171 ; 1340.428,1431.138 1340.428,1433.171 ; 1340.428,1456.138 1340.428,1458.171 ; 1340.428,1456.138 1340.428,1458.171 ; 1342.403,1428.263 ccw(c1342.586,1428.263) 1342.586,1428.079 ; 1342.403,1428.263 ccw(c1342.586,1428.263) 1342.586,1428.079 ; 1342.403,1428.263 1342.403,1428.796 ; 1342.403,1428.263 1342.403,1428.796 ; 1342.403,1428.796 cw(c1342.586,1428.796) 1342.586,1428.98 ; 1342.403,1428.796 cw(c1342.586,1428.796) 1342.586,1428.98 ; 1342.403,1435.513 ccw(c1342.586,1435.513) 1342.586,1435.329 ; 1342.403,1435.513 ccw(c1342.586,1435.513) 1342.586,1435.329 ; 1342.403,1435.513 1342.403,1436.046 ; 1342.403,1435.513 1342.403,1436.046 ; 1342.403,1436.046 cw(c1342.586,1436.046) 1342.586,1436.229 ; 1342.403,1436.046 cw(c1342.586,1436.046) 1342.586,1436.229 ; 1342.403,1453.263 ccw(c1342.586,1453.263) 1342.586,1453.079 ; 1342.403,1453.263 ccw(c1342.586,1453.263) 1342.586,1453.079 ; 1342.403,1453.263 1342.403,1453.796 ; 1342.403,1453.263 1342.403,1453.796 ; 1342.403,1453.796 cw(c1342.586,1453.796) 1342.586,1453.979 ; 1342.403,1453.796 cw(c1342.586,1453.796) 1342.586,1453.979 ; 1342.403,1460.513 ccw(c1342.586,1460.513) 1342.586,1460.329 ; 1342.403,1460.513 ccw(c1342.586,1460.513) 1342.586,1460.329 ; 1342.403,1460.513 1342.403,1461.046 ; 1342.403,1460.513 1342.403,1461.046 ; 1342.403,1461.046 cw(c1342.586,1461.046) 1342.586,1461.23 ; 1342.403,1461.046 cw(c1342.586,1461.046) 1342.586,1461.23 ; 1342.586,1428.08 1344.619,1428.08 ; 1342.586,1428.08 1344.619,1428.08 ; 1342.586,1428.979 1344.619,1428.979 ; 1342.586,1428.979 1344.619,1428.979 ; 1342.586,1435.329 1344.619,1435.329 ; 1342.586,1435.329 1344.619,1435.329 ; 1342.586,1436.229 1344.619,1436.229 ; 1342.586,1436.229 1344.619,1436.229 ; 1342.586,1453.079 1344.619,1453.079 ; 1342.586,1453.079 1344.619,1453.079 ; 1342.586,1453.979 1344.619,1453.979 ; 1342.586,1453.979 1344.619,1453.979 ; 1342.586,1460.329 1344.619,1460.329 ; 1342.586,1460.329 1344.619,1460.329 ; 1342.586,1461.23 1344.619,1461.23 ; 1342.586,1461.23 1344.619,1461.23 ; 1344.619,1428.079 ccw(c1344.619,1428.263) 1344.803,1428.263 ; 1344.619,1428.079 ccw(c1344.619,1428.263) 1344.803,1428.263 ; 1344.619,1428.98 cw(c1344.619,1428.796) 1344.803,1428.796 ; 1344.619,1428.98 cw(c1344.619,1428.796) 1344.803,1428.796 ; 1344.619,1435.329 ccw(c1344.619,1435.513) 1344.803,1435.513 ; 1344.619,1435.329 ccw(c1344.619,1435.513) 1344.803,1435.513 ; 1344.619,1436.229 cw(c1344.619,1436.046) 1344.803,1436.046 ; 1344.619,1436.229 cw(c1344.619,1436.046) 1344.803,1436.046 ; 1344.619,1453.079 ccw(c1344.619,1453.263) 1344.803,1453.263 ; 1344.619,1453.079 ccw(c1344.619,1453.263) 1344.803,1453.263 ; 1344.619,1453.979 cw(c1344.619,1453.796) 1344.803,1453.796 ; 1344.619,1453.979 cw(c1344.619,1453.796) 1344.803,1453.796 ; 1344.619,1460.329 ccw(c1344.619,1460.513) 1344.803,1460.513 ; 1344.619,1460.329 ccw(c1344.619,1460.513) 1344.803,1460.513 ; 1344.619,1461.23 cw(c1344.619,1461.046) 1344.803,1461.046 ; 1344.619,1461.23 cw(c1344.619,1461.046) 1344.803,1461.046 ; 1344.803,1428.263 1344.803,1428.796 ; 1344.803,1428.263 1344.803,1428.796 ; 1344.803,1435.513 1344.803,1436.046 ; 1344.803,1435.513 1344.803,1436.046 ; 1344.803,1453.263 1344.803,1453.796 ; 1344.803,1453.263 1344.803,1453.796 ; 1344.803,1460.513 1344.803,1461.046 ; 1344.803,1460.513 1344.803,1461.046 ; 1346.778,1431.138 ccw(c1346.961,1431.138) 1346.961,1430.954 ; 1346.778,1431.138 ccw(c1346.961,1431.138) 1346.961,1430.954 ; 1346.778,1431.138 1346.778,1433.171 ; 1346.778,1431.138 1346.778,1433.171 ; 1346.778,1433.171 cw(c1346.961,1433.171) 1346.961,1433.355 ; 1346.778,1433.171 cw(c1346.961,1433.171) 1346.961,1433.355 ; 1346.778,1456.138 ccw(c1346.961,1456.138) 1346.961,1455.954 ; 1346.778,1456.138 ccw(c1346.961,1456.138) 1346.961,1455.954 ; 1346.778,1456.138 1346.778,1458.171 ; 1346.778,1456.138 1346.778,1458.171 ; 1346.778,1458.171 cw(c1346.961,1458.171) 1346.961,1458.355 ; 1346.778,1458.171 cw(c1346.961,1458.171) 1346.961,1458.355 ; 1346.961,1430.955 1347.494,1430.955 ; 1346.961,1430.955 1347.494,1430.955 ; 1346.961,1433.354 1347.494,1433.354 ; 1346.961,1433.354 1347.494,1433.354 ; 1346.961,1455.954 1347.494,1455.954 ; 1346.961,1455.954 1347.494,1455.954 ; 1346.961,1458.355 1347.494,1458.355 ; 1346.961,1458.355 1347.494,1458.355 ; 1347.494,1430.954 ccw(c1347.494,1431.138) 1347.678,1431.138 ; 1347.494,1430.954 ccw(c1347.494,1431.138) 1347.678,1431.138 ; 1347.494,1433.355 cw(c1347.494,1433.171) 1347.678,1433.171 ; 1347.494,1433.355 cw(c1347.494,1433.171) 1347.678,1433.171 ; 1347.494,1455.954 ccw(c1347.494,1456.138) 1347.678,1456.138 ; 1347.494,1455.954 ccw(c1347.494,1456.138) 1347.678,1456.138 ; 1347.494,1458.355 cw(c1347.494,1458.171) 1347.678,1458.171 ; 1347.494,1458.355 cw(c1347.494,1458.171) 1347.678,1458.171 ; 1347.678,1431.138 1347.678,1433.171 ; 1347.678,1431.138 1347.678,1433.171 ; 1347.678,1456.138 1347.678,1458.171 ; 1347.678,1456.138 1347.678,1458.171 ; 1349.528,1406.138 ccw(c1349.711,1406.138) 1349.711,1405.955 ; 1349.528,1406.138 ccw(c1349.711,1406.138) 1349.711,1405.955 ; 1349.528,1406.138 1349.528,1408.171 ; 1349.528,1406.138 1349.528,1408.171 ; 1349.528,1408.171 cw(c1349.711,1408.171) 1349.711,1408.355 ; 1349.528,1408.171 cw(c1349.711,1408.171) 1349.711,1408.355 ; 1349.711,1405.955 1350.244,1405.955 ; 1349.711,1405.955 1350.244,1405.955 ; 1349.711,1408.355 1350.244,1408.355 ; 1349.711,1408.355 1350.244,1408.355 ; 1350.244,1405.955 ccw(c1350.244,1406.138) 1350.428,1406.138 ; 1350.244,1405.955 ccw(c1350.244,1406.138) 1350.428,1406.138 ; 1350.244,1408.355 cw(c1350.244,1408.171) 1350.428,1408.171 ; 1350.244,1408.355 cw(c1350.244,1408.171) 1350.428,1408.171 ; 1350.428,1406.138 1350.428,1408.171 ; 1350.428,1406.138 1350.428,1408.171 ; 1352.403,1403.263 ccw(c1352.586,1403.263) 1352.586,1403.08 ; 1352.403,1403.263 ccw(c1352.586,1403.263) 1352.586,1403.08 ; 1352.403,1403.263 1352.403,1403.796 ; 1352.403,1403.263 1352.403,1403.796 ; 1352.403,1403.796 cw(c1352.586,1403.796) 1352.586,1403.98 ; 1352.403,1403.796 cw(c1352.586,1403.796) 1352.586,1403.98 ; 1352.403,1410.513 ccw(c1352.586,1410.513) 1352.586,1410.33 ; 1352.403,1410.513 ccw(c1352.586,1410.513) 1352.586,1410.33 ; 1352.403,1410.513 1352.403,1411.046 ; 1352.403,1410.513 1352.403,1411.046 ; 1352.403,1411.046 cw(c1352.586,1411.046) 1352.586,1411.23 ; 1352.403,1411.046 cw(c1352.586,1411.046) 1352.586,1411.23 ; 1352.586,1403.08 1354.619,1403.08 ; 1352.586,1403.08 1354.619,1403.08 ; 1352.586,1403.98 1354.619,1403.98 ; 1352.586,1403.98 1354.619,1403.98 ; 1352.586,1410.33 1354.619,1410.33 ; 1352.586,1410.33 1354.619,1410.33 ; 1352.586,1411.229 1354.619,1411.229 ; 1352.586,1411.229 1354.619,1411.229 ; 1354.619,1403.08 ccw(c1354.619,1403.263) 1354.803,1403.263 ; 1354.619,1403.08 ccw(c1354.619,1403.263) 1354.803,1403.263 ; 1354.619,1403.98 cw(c1354.619,1403.796) 1354.803,1403.796 ; 1354.619,1403.98 cw(c1354.619,1403.796) 1354.803,1403.796 ; 1354.619,1410.33 ccw(c1354.619,1410.513) 1354.803,1410.513 ; 1354.619,1410.33 ccw(c1354.619,1410.513) 1354.803,1410.513 ; 1354.619,1411.23 cw(c1354.619,1411.046) 1354.803,1411.046 ; 1354.619,1411.23 cw(c1354.619,1411.046) 1354.803,1411.046 ; 1354.803,1403.263 1354.803,1403.796 ; 1354.803,1403.263 1354.803,1403.796 ; 1354.803,1410.513 1354.803,1411.046 ; 1354.803,1410.513 1354.803,1411.046 ; 1356.778,1406.138 ccw(c1356.961,1406.138) 1356.961,1405.955 ; 1356.778,1406.138 ccw(c1356.961,1406.138) 1356.961,1405.955 ; 1356.778,1406.138 1356.778,1408.171 ; 1356.778,1406.138 1356.778,1408.171 ; 1356.778,1408.171 cw(c1356.961,1408.171) 1356.961,1408.355 ; 1356.778,1408.171 cw(c1356.961,1408.171) 1356.961,1408.355 ; 1356.961,1405.955 1357.494,1405.955 ; 1356.961,1405.955 1357.494,1405.955 ; 1356.961,1408.355 1357.494,1408.355 ; 1356.961,1408.355 1357.494,1408.355 ; 1357.494,1405.955 ccw(c1357.494,1406.138) 1357.678,1406.138 ; 1357.494,1405.955 ccw(c1357.494,1406.138) 1357.678,1406.138 ; 1357.494,1408.355 cw(c1357.494,1408.171) 1357.678,1408.171 ; 1357.494,1408.355 cw(c1357.494,1408.171) 1357.678,1408.171 ; 1357.678,1406.138 1357.678,1408.171 ; 1357.678,1406.138 1357.678,1408.171 ; 1359.528,1431.138 ccw(c1359.711,1431.138) 1359.711,1430.954 ; 1359.528,1431.138 ccw(c1359.711,1431.138) 1359.711,1430.954 ; 1359.528,1431.138 1359.528,1433.171 ; 1359.528,1431.138 1359.528,1433.171 ; 1359.528,1433.171 cw(c1359.711,1433.171) 1359.711,1433.355 ; 1359.528,1433.171 cw(c1359.711,1433.171) 1359.711,1433.355 ; 1359.711,1430.955 1360.244,1430.955 ; 1359.711,1430.955 1360.244,1430.955 ; 1359.711,1433.354 1360.244,1433.354 ; 1359.711,1433.354 1360.244,1433.354 ; 1360.244,1430.954 ccw(c1360.244,1431.138) 1360.428,1431.138 ; 1360.244,1430.954 ccw(c1360.244,1431.138) 1360.428,1431.138 ; 1360.244,1433.355 cw(c1360.244,1433.171) 1360.428,1433.171 ; 1360.244,1433.355 cw(c1360.244,1433.171) 1360.428,1433.171 ; 1360.428,1431.138 1360.428,1433.171 ; 1360.428,1431.138 1360.428,1433.171 ; 1361.491,1395.654 ccw(c1361.491,1397.654) 1363.446,1397.229 ; 1361.491,1395.654 ccw(c1361.491,1397.654) 1363.446,1397.229 ; 1362.403,1428.263 ccw(c1362.586,1428.263) 1362.586,1428.079 ; 1362.403,1428.263 ccw(c1362.586,1428.263) 1362.586,1428.079 ; 1362.403,1428.263 1362.403,1428.796 ; 1362.403,1428.263 1362.403,1428.796 ; 1362.403,1428.796 cw(c1362.586,1428.796) 1362.586,1428.98 ; 1362.403,1428.796 cw(c1362.586,1428.796) 1362.586,1428.98 ; 1362.403,1435.513 ccw(c1362.586,1435.513) 1362.586,1435.329 ; 1362.403,1435.513 ccw(c1362.586,1435.513) 1362.586,1435.329 ; 1362.403,1435.513 1362.403,1436.046 ; 1362.403,1435.513 1362.403,1436.046 ; 1362.403,1436.046 cw(c1362.586,1436.046) 1362.586,1436.229 ; 1362.403,1436.046 cw(c1362.586,1436.046) 1362.586,1436.229 ; 1362.586,1428.08 1364.619,1428.08 ; 1362.586,1428.08 1364.619,1428.08 ; 1362.586,1428.979 1364.619,1428.979 ; 1362.586,1428.979 1364.619,1428.979 ; 1362.586,1435.329 1364.619,1435.329 ; 1362.586,1435.329 1364.619,1435.329 ; 1362.586,1436.229 1364.619,1436.229 ; 1362.586,1436.229 1364.619,1436.229 ; 1363.446,1397.229 1376.374,1456.603 ; 1363.446,1397.229 1376.374,1456.603 ; 1363.528,1456.138 ccw(c1363.711,1456.138) 1363.711,1455.954 ; 1363.528,1456.138 ccw(c1363.711,1456.138) 1363.711,1455.954 ; 1363.528,1456.138 1363.528,1458.171 ; 1363.528,1456.138 1363.528,1458.171 ; 1363.528,1458.171 cw(c1363.711,1458.171) 1363.711,1458.355 ; 1363.528,1458.171 cw(c1363.711,1458.171) 1363.711,1458.355 ; 1363.711,1455.954 1364.244,1455.954 ; 1363.711,1455.954 1364.244,1455.954 ; 1363.711,1458.355 1364.244,1458.355 ; 1363.711,1458.355 1364.244,1458.355 ; 1364.244,1455.954 ccw(c1364.244,1456.138) 1364.428,1456.138 ; 1364.244,1455.954 ccw(c1364.244,1456.138) 1364.428,1456.138 ; 1364.244,1458.355 cw(c1364.244,1458.171) 1364.428,1458.171 ; 1364.244,1458.355 cw(c1364.244,1458.171) 1364.428,1458.171 ; 1364.428,1456.138 1364.428,1458.171 ; 1364.428,1456.138 1364.428,1458.171 ; 1364.619,1428.079 ccw(c1364.619,1428.263) 1364.803,1428.263 ; 1364.619,1428.079 ccw(c1364.619,1428.263) 1364.803,1428.263 ; 1364.619,1428.98 cw(c1364.619,1428.796) 1364.803,1428.796 ; 1364.619,1428.98 cw(c1364.619,1428.796) 1364.803,1428.796 ; 1364.619,1435.329 ccw(c1364.619,1435.513) 1364.803,1435.513 ; 1364.619,1435.329 ccw(c1364.619,1435.513) 1364.803,1435.513 ; 1364.619,1436.229 cw(c1364.619,1436.046) 1364.803,1436.046 ; 1364.619,1436.229 cw(c1364.619,1436.046) 1364.803,1436.046 ; 1364.803,1428.263 1364.803,1428.796 ; 1364.803,1428.263 1364.803,1428.796 ; 1364.803,1435.513 1364.803,1436.046 ; 1364.803,1435.513 1364.803,1436.046 ; 1366.403,1453.263 ccw(c1366.586,1453.263) 1366.586,1453.079 ; 1366.403,1453.263 ccw(c1366.586,1453.263) 1366.586,1453.079 ; 1366.403,1453.263 1366.403,1453.796 ; 1366.403,1453.263 1366.403,1453.796 ; 1366.403,1453.796 cw(c1366.586,1453.796) 1366.586,1453.979 ; 1366.403,1453.796 cw(c1366.586,1453.796) 1366.586,1453.979 ; 1366.403,1460.513 ccw(c1366.586,1460.513) 1366.586,1460.329 ; 1366.403,1460.513 ccw(c1366.586,1460.513) 1366.586,1460.329 ; 1366.403,1460.513 1366.403,1461.046 ; 1366.403,1460.513 1366.403,1461.046 ; 1366.403,1461.046 cw(c1366.586,1461.046) 1366.586,1461.23 ; 1366.403,1461.046 cw(c1366.586,1461.046) 1366.586,1461.23 ; 1366.586,1453.079 1368.619,1453.079 ; 1366.586,1453.079 1368.619,1453.079 ; 1366.586,1453.979 1368.619,1453.979 ; 1366.586,1453.979 1368.619,1453.979 ; 1366.586,1460.329 1368.619,1460.329 ; 1366.586,1460.329 1368.619,1460.329 ; 1366.586,1461.23 1368.619,1461.23 ; 1366.586,1461.23 1368.619,1461.23 ; 1366.778,1431.138 ccw(c1366.961,1431.138) 1366.961,1430.954 ; 1366.778,1431.138 ccw(c1366.961,1431.138) 1366.961,1430.954 ; 1366.778,1431.138 1366.778,1433.171 ; 1366.778,1431.138 1366.778,1433.171 ; 1366.778,1433.171 cw(c1366.961,1433.171) 1366.961,1433.355 ; 1366.778,1433.171 cw(c1366.961,1433.171) 1366.961,1433.355 ; 1366.961,1430.955 1367.494,1430.955 ; 1366.961,1430.955 1367.494,1430.955 ; 1366.961,1433.354 1367.494,1433.354 ; 1366.961,1433.354 1367.494,1433.354 ; 1367.494,1430.954 ccw(c1367.494,1431.138) 1367.678,1431.138 ; 1367.494,1430.954 ccw(c1367.494,1431.138) 1367.678,1431.138 ; 1367.494,1433.355 cw(c1367.494,1433.171) 1367.678,1433.171 ; 1367.494,1433.355 cw(c1367.494,1433.171) 1367.678,1433.171 ; 1367.678,1431.138 1367.678,1433.171 ; 1367.678,1431.138 1367.678,1433.171 ; 1368.619,1453.079 ccw(c1368.619,1453.263) 1368.803,1453.263 ; 1368.619,1453.079 ccw(c1368.619,1453.263) 1368.803,1453.263 ; 1368.619,1453.979 cw(c1368.619,1453.796) 1368.803,1453.796 ; 1368.619,1453.979 cw(c1368.619,1453.796) 1368.803,1453.796 ; 1368.619,1460.329 ccw(c1368.619,1460.513) 1368.803,1460.513 ; 1368.619,1460.329 ccw(c1368.619,1460.513) 1368.803,1460.513 ; 1368.619,1461.23 cw(c1368.619,1461.046) 1368.803,1461.046 ; 1368.619,1461.23 cw(c1368.619,1461.046) 1368.803,1461.046 ; 1368.803,1453.263 1368.803,1453.796 ; 1368.803,1453.263 1368.803,1453.796 ; 1368.803,1460.513 1368.803,1461.046 ; 1368.803,1460.513 1368.803,1461.046 ; 1370.778,1456.138 ccw(c1370.961,1456.138) 1370.961,1455.954 ; 1370.778,1456.138 ccw(c1370.961,1456.138) 1370.961,1455.954 ; 1370.778,1456.138 1370.778,1458.171 ; 1370.778,1456.138 1370.778,1458.171 ; 1370.778,1458.171 cw(c1370.961,1458.171) 1370.961,1458.355 ; 1370.778,1458.171 cw(c1370.961,1458.171) 1370.961,1458.355 ; 1370.961,1455.954 1371.494,1455.954 ; 1370.961,1455.954 1371.494,1455.954 ; 1370.961,1458.355 1371.494,1458.355 ; 1370.961,1458.355 1371.494,1458.355 ; 1371.494,1455.954 ccw(c1371.494,1456.138) 1371.678,1456.138 ; 1371.494,1455.954 ccw(c1371.494,1456.138) 1371.678,1456.138 ; 1371.494,1458.355 cw(c1371.494,1458.171) 1371.678,1458.171 ; 1371.494,1458.355 cw(c1371.494,1458.171) 1371.678,1458.171 ; 1371.678,1456.138 1371.678,1458.171 ; 1371.678,1456.138 1371.678,1458.171 ; 1374.603,1468.655 cw(c1374.603,1466.655) 1376.603,1466.655 ; 1374.603,1468.655 cw(c1374.603,1466.655) 1376.603,1466.655 ; 1376.374,1456.603 ccw(c1366.603,1458.73) 1376.603,1458.731 ; 1376.374,1456.603 ccw(c1366.603,1458.73) 1376.603,1458.731 ; 1376.603,1458.731 1376.603,1466.655 ; 1376.603,1458.731 1376.603,1466.655

## Other copper
TOP:
  drawing of 341 lines, arcs and shapes, not listed
BOTTOM:
  drawing of 312 lines, arcs and shapes, not listed

## Silkscreen, mask and mechanical layers (free items; w line width, h text height)
Top Overlay:
  circle w0.025: c1319.677,1456.866 r7
  circle w0.025: c1343.604,1456.967 r7
  circle w0.025: c1367.556,1457.12 r7
  circle w0.025: c1323.969,1431.974 r7
  circle w0.025: c1343.375,1432.05 r7
  circle w0.025: c1363.314,1432.101 r7
  circle w0.025: c1333.469,1406.802 r7
  circle w0.025: c1353.23,1406.853 r7
  text "LCD" at 1330.497,1466.035 h1.27
  text "3" at 1319.067,1464.74 h1.27
  text "1" at 1367.378,1464.638 h1.27
  text "2" at 1343.248,1464.486 h1.27
  text "B-" at 1326.154,1464.206 h1.27
  text "R+" at 1335.45,1463.851 h1.27
  text "5" at 1343.299,1439.619 h1.27
  text "6" at 1324.046,1439.568 h1.27
  text "4" at 1362.654,1439.517 h1.27
  text "B-" at 1331.386,1422.347 h1.27
  text "6" at 1342.029,1422.322 h1.27
  text "R+" at 1334.434,1422.296 h1.27
  text "5" at 1344.442,1422.296 h1.27
  text "7" at 1339.463,1422.271 h1.27
  text "8" at 1337,1422.245 h1.27
  text "4" at 1346.931,1422.169 h1.27
  text "1" at 1354.526,1422.169 h1.27
  text "2" at 1351.859,1422.144 h1.27
  text "3" at 1349.319,1422.093 h1.27
  text "7" at 1352.722,1414.092 h1.27
  text "8" at 1332.555,1414.041 h1.27
  text "Qv-601-shoubing" at 1333.088,1397.506 h1.27
NCLEGEND-1-2:
  lines w0.025: 1382.11,1423.975 1504.944,1423.975 ; 1382.11,1430.325 1504.944,1430.325 ; 1382.11,1436.675 1504.944,1436.675 ; 1382.11,1443.025 1504.944,1443.025 ; 1393.077,1420.8 1393.977,1420.8 ; 1393.527,1420.35 1393.527,1421.25 ; 1404.945,1417.625 1404.945,1436.675 ; 1452.976,1417.625 1452.976,1436.675 ; 1485.259,1417.625 1485.259,1436.675 ; 1382.11,1417.625 1382.11,1449.525 1504.944,1449.525 1504.944,1417.625 1382.11,1417.625 ; 1393.273,1426.896 1393.781,1426.896 1393.781,1427.404 1393.273,1427.404 1393.273,1426.896
  text "DRILL CHART: TOP to BOTTOM" at 1410.507,1444.763 h3.17
  text "ALL UNITS ARE IN MILLIMETERS" at 1407.967,1438.263 h3.17
  text "FIGURE" at 1385.907,1431.913 h3.17
  text "SIZE" at 1423.88,1431.913 h3.17
  text "PLATED" at 1461.498,1431.913 h3.17
  text "QTY" at 1491.292,1431.913 h3.17
  text "0.508" at 1422.61,1425.563 h3.17
  text "PLATED" at 1461.498,1425.563 h3.17
  text "245" at 1491.292,1425.563 h3.17
  text "0.9" at 1425.15,1419.213 h3.17
  text "PLATED" at 1461.498,1419.213 h3.17
  text "12" at 1492.562,1419.213 h3.17